# Altium PCB WallLight_V1.0.PcbDoc
Units mm, origin at the board's own origin, x right, y up, seen from the top; angles counter-clockwise.
Board outline 40 x 35 mm, 4 copper layers (Top Layer, Mid-Layer 1, Mid-Layer 2, Bottom Layer), stack 1.578 mm thick; 1 components, 123 nets, 18 pads, 0 vias.
Unrouted connection lines stored in the file: 8.
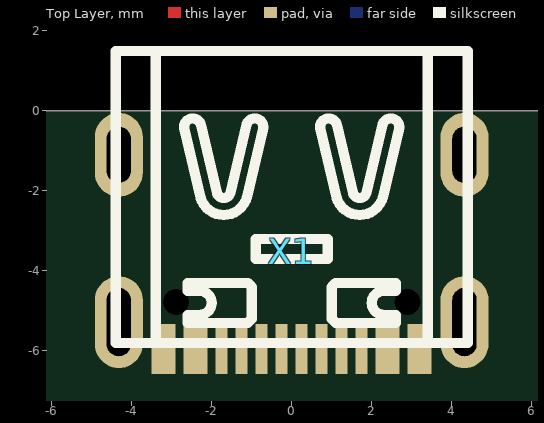
[diagram p0: Top Layer view]
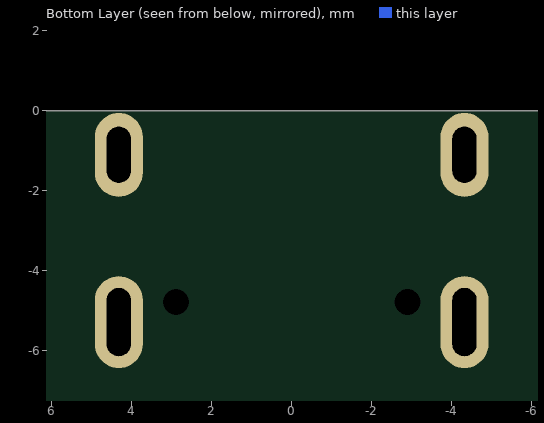
[diagram p1: Bottom Layer view, seen from below]

## Layer stack, top to bottom
Top Solder: solder mask 0.0102, Solder Resist, Dk 3.5
Top Layer: signal copper 0.0356
Dielectric1: dielectric 0.2, FR-4, Dk 4.8
Mid-Layer 1: signal copper 0.0356
Dielectric2: dielectric 1.036, FR-4, Dk 4.8
Mid-Layer 2: signal copper 0.0356
Dielectric3: dielectric 0.2, FR-4, Dk 4.8
Bottom Layer: signal copper 0.0356
Bottom Solder: solder mask 0.0102, Solder Resist, Dk 3.5

## Board outline
-20,-35 -20,0 20,0 20,-35

## Design rules (kind name [scope] priority, off if disabled: settings)
Clearance "Stitching GND" [IsStitchingVia and InNet('GND') vs (IsVia and (Not IsStitchingVia)) Or IsPad] p1: gap=0.127 ignorepadtopadclearanceinfootprint=FALSE
Clearance Clearance_Poly_GND_DiffPair [InPolygon and InNet('GND') vs InAnyDifferentialPair] p2: gap=0.838 ignorepadtopadclearanceinfootprint=FALSE
Clearance Clearance_Poly_GND_Top [InPolygon and InNet('GND') vs OnLayer('Top Layer')] p3: gap=0.305 ignorepadtopadclearanceinfootprint=FALSE
Clearance Clearance_Poly_GND_Bottom [InPolygon and InNet('GND') vs OnLayer('Bottom Layer')] p4: gap=0.305 ignorepadtopadclearanceinfootprint=FALSE
Clearance Clearance_Poly [InPolygon vs Not InNet('GND')] p5: gap=0.152 ignorepadtopadclearanceinfootprint=FALSE
Clearance Clearance_Via [isvia AND (AsMM(HoleDiameter) = 0.2) vs isvia AND (AsMM(HoleDiameter) = 0.2)] p6: gap=0.249 ignorepadtopadclearanceinfootprint=FALSE
Clearance [All] p7: gap=0.089 ignorepadtopadclearanceinfootprint=FALSE except(0.127: SMDPad-SMDPad)
ComponentClearance Component_Display [(Identifier = 'Spacer')] p1: gap=0 collisioncheckmode=3 verticalgap=0 showdistances=FALSE
ComponentClearance [All] p2: gap=0 collisioncheckmode=3 verticalgap=0.04 showdistances=TRUE
DiffPairsRouting [All] p1: maxlimit=2.54 minlimit=0.089 mostfreqgap=0.127 toplayer_minwidth=0.127 toplayer_maxwidth=0.381 toplayer_prefwidth=0.127 midlayer1_minwidth=0.127 midlayer1_maxwidth=0.381 midlayer1_prefwidth=0.127 midlayer2_minwidth=0.127 midlayer2_maxwidth=0.381 midlayer2_prefwidth=0.127 bottomlayer_minwidth=0.127 bottomlayer_maxwidth=0.381 bottomlayer_prefwidth=0.127 maxuncoupledlength=12.7
Height [All] p1: minheight=0 maxheight=150 prefheight=2
HoleSize [All] p1: absolutevalues=TRUE maxlimit=20.32 minlimit=0.2 maxpercent=80.000 minpercent=20.000
HoleToHoleClearance [InDrillLayerPair('Top Layer - Bottom Layer')] p1: gap=0.5 allowstackedmicrovias=FALSE
MinimumAnnularRing [All] p1: minimumring=0.089
MinimumSolderMaskSliver [All] p1: minsoldermaskwidth=0
PlaneConnect [All] p1: pad.planeconnectstyle=Relief pad.reliefexpansion=0.508 pad.reliefentries=4 pad.reliefconductorwidth=0.254 pad.reliefairgap=0.254 via.planeconnectstyle=Direct via.reliefexpansion=0.508 via.reliefentries=4 via.reliefconductorwidth=0.254 via.reliefairgap=0.254
PolygonConnect [All] p1: thpad.connectstyle=Relief thpad.reliefconductorwidth=0.254 thpad.reliefentries=4 thpad.polygonreliefangle="90 Angle" thpad.airgapwidth=0.254 smdpad.connectstyle=Relief smdpad.reliefconductorwidth=0.254 smdpad.reliefentries=4 smdpad.polygonreliefangle="90 Angle" smdpad.airgapwidth=0.254 via.connectstyle=Direct via.reliefconductorwidth=0.254 via.reliefentries=4 via.polygonreliefangle="90 Angle" via.airgapwidth=0.254
RoutingVias [All] p1: holewidth=0.3 width=0.62 viastyle="Through Hole" minholewidth=0.2 minwidth=0.44 maxholewidth=0.8 maxwidth=1.1
SilkToSilkClearance [All] p1: silktosilkclearance=0
SilkToSolderMaskClearance [IsPad] p1: minsilkscreentomaskgap=0 clearancetoexposedcopper=TRUE
SolderMaskExpansion [All] p1: expansion=0.102 istentingtop=FALSE
Width [Not InNet('No Net')] p1: maxlimit=4 minlimit=0.089 preferedwidth=0.254
Width Logos [All] p2: maxlimit=0.254 minlimit=0.003 preferedwidth=0.003
21 further rules are at their usual default settings.

## Classes and differential pairs
differential pair USB_D: +USB_D_P -USB_D_N

## Components (designator, comment, footprint, x,y, rotation, side; value= is the part's Value field where it differs from the comment)
X1 "USB 2.0 Typ-C" "SMD USB-C Socket (A40-00119)" 0,1.5 r180 top

## Footprints (in the part's own frame and the unit in brackets; to place one, negate y for a bottom-side part, rotate by r counter-clockwise, add the part's x,y. Pads: shape width x height; smd on the part's side, far side on the other; paste and mask are expansions set on the pad)
"SMD USB-C Socket (A40-00119)" [mm]
  rect 0.6x1.25 smd: A1B12(-3.2,7.45) A4B9(-2.4,7.45) B1A12(3.2,7.45) B4A9(2.4,7.45)
  rect 0.3x1.25 smd: A5(-1.25,7.45) A6(-0.25,7.45) A7(0.25,7.45) A8(1.25,7.45) B5(1.75,7.45) B6(0.75,7.45) B7(-0.75,7.45) B8(-1.75,7.45)
  oval 1.2x2.1 hole 0.6 slot 1.4 at 90 deg: G1(-4.32,2.6) G3(4.32,2.6)
  oval 1.2x2.3 hole 0.6 slot 1.7 at 90 deg: G2(-4.32,6.78) G4(4.32,6.78)
  round 0 hole 0.65 unplated: NC(-2.89,6.28) NC(2.89,6.28)
  silkscreen extent -4.4,0 4.4,7.3, body extent -4.47,0 4.48,7.75, height 3.26

## Part data
X1: library part X-USB-Buchse, "Typ-C", Component Value=USB4105-GF-A, JLC-Parts=C167321, aliExpress=33045191307, Component Description="USB Connector Type-C", ComponentLink1Description=Datasheet, ComponentLink1URL=https://datasheet.lcsc.com/lcsc/2103051833_Jing-Extension-of-the-Electronic-Co--918-418K2023S40001_C167321.pdf, Digikey=2073-USB4105-GF-ACT-ND, Farnell=3583366, Unit Price=0.34

## Nets (pads, with @x,y where several pads share a name; then routed paths per layer and width w, separated by ;. In a path a pad name is that pad's centre, name@x,y a point inside that pad or via, vN(x,y) a via of type N, cw(c..) or ccw(c..) an arc to the next point about the centre after c; other vN are vias at no path point)
3V3: 
BAT_MSR: 
BL: 
DSA_BL: 
DSA_C\S\: 
DSA_C\S\0: 
DSA_C\S\1: 
DSA_C\S\2: 
DSA_C\S\3: 
DSA_C\S\4: 
DSA_C\S\5: 
DSA_C\S\6: 
DSA_C\S\7: 
DSA_CS0: 
DSA_CS1: 
DSA_CS2: 
DSA_DC: 
DSA_MOSI: 
DSA_R\S\T\: 
DSA_SCLK: 
DSM_BL: 
DSM_C\S\: 
DSM_DC: 
DSM_MOSI: 
DSM_R\S\T\: 
DSM_SCLK: 
GND: X1.A1B12 X1.B1A12 X1.G1 X1.G2 X1.G3 X1.G4
HMI_CLK: 
HMI_DATA: 
HMI_ENA: 
HMI_ENB: 
HMI_ENS: 
HMI_L\D\: 
NetA1_1: 
NetC9_2: 
NetC11_1: 
NetC12_1: 
NetC13_1: 
NetC14_2: 
NetC16_2: 
NetC23_1: 
NetC24_2: 
NetC27_2: 
NetC30_2: 
NetC33_2: 
NetD3_K: 
NetD4_K: 
NetK1_G: 
NetK3_G: 
NetK6_D: 
NetK6_G: 
NetK9_D: 
NetL2_1: 
NetP1_K: 
NetP2_2: 
NetP3_2: 
NetP4_2: 
NetP5_2: 
NetP6_2: 
NetP7_2: 
NetP8_2: 
NetP9_2: 
NetP10_21: 
NetP10_22: 
NetP10_23: 
NetP10_24: 
NetR2_2: 
NetR3_1: X1.B5
NetR4_1: X1.A5
NetR9_2: 
NetR10_2: 
NetR35_1: 
NetR35_2: 
NetR35_3: 
NetR35_4: 
NetR36_1: 
NetR36_2: 
NetR36_3: 
NetR36_4: 
NetR37_1: 
NetR37_2: 
NetR37_3: 
NetR37_4: 
NetR38_1: 
NetR38_2: 
NetR38_3: 
NetR38_4: 
NetR39_1: 
NetR39_2: 
NetR39_3: 
NetR39_4: 
NetR40_1: 
NetR40_2: 
NetR40_3: 
NetR40_4: 
NetR41_1: 
NetR41_2: 
NetR41_3: 
NetR41_4: 
NetR42_1: 
NetR42_2: 
NetR42_3: 
NetR42_4: 
NetS2_1: 
NetTP3_1: 
NetTP4_1: 
NetTP11_1: 
NetTP12_1: 
NetTP19_1: 
NetU9_9: 
NetU10_9: 
NetU11_9: 
PWR_OFF: 
PWR_SW: 
TCH_I\N\T\: 
TCH_R\S\T\: 
TCH_SCL: 
TCH_SDA: 
USB_D_N: X1.A7 X1.B7
USB_D_P: X1.A6 X1.B6
VBAT: 
VBUS: X1.A4B9 X1.B4A9
VIN: 
pads on no net: X1.A8 X1.B8 X1.NC

## Silkscreen, mask and mechanical layers (free items; w line width, h text height)
Mechanical 1:
  lines w0.254: -20,-35 20,-35 20,0 0,0 -20,0 -20,-35
Mechanical 15:
  lines w0.127: -148.58,-54.99 -143.5,-54.99 ; -148.58,-6.73 -143.5,-6.73 ; -148.58,41.53 -143.5,41.53 ; -143.5,-90.55 -29.2,-90.55 ; -143.5,-82.93 -29.2,-82.93 ; -120.64,-98.17 -120.64,-82.93 ; -75.555,-103.25 -75.555,-98.17 ; -75.555,84.71 -75.555,89.79 ; -67.3,-98.17 -67.3,-82.93 -67.3,-67.69 ; -67.3,-75.31 -29.2,-75.31 ; -2.53,-103.25 -2.53,-98.17 ; -2.53,84.71 -2.53,89.79 ; 6.36,-98.17 -29.2,-98.17 ; 70.495,-103.25 70.495,-98.17 ; 70.495,84.71 70.495,89.79 ; 128.52,-55.25 133.6,-55.25 ; 128.52,-6.25 133.6,-6.25 ; 128.52,41.75 133.6,41.75 ; -143.5,-98.17 128.52,-98.25 128.52,84.75 -143.5,84.71 -143.5,-98.17 ; -143.5,-98.17 -29.2,-98.17 ; -143.5,-98.17 -143.5,-67.69 -67.3,-67.69 ; -67.3,-67.69 -29.2,-67.69 -29.2,-98.17 ; -148.58,-103.25 133.52,-103.25 133.52,89.75 -148.58,89.79 -148.58,-103.25
  text "4" at -111.42,86.361 h1.78
  text "3" at -38.522,86.361 h1.78
  text "2" at 34.63,86.361 h1.78
  text "1" at 107.274,86.361 h1.78
  text "A" at 132.52,63.75 h1.78
  text "A" at -145.405,63.349 h1.78
  text "B" at 131.52,15.75 h1.78
  text "B" at -145.405,15.292 h1.78
  text "C" at -145.405,-33.222 h1.78
  text "C" at 131.52,-33.25 h1.78
  text "TITLE:" at -68.57,-70.23 h1.14
  text "ENGINEER:" at -30.47,-70.23 h1.14
  text "Florian Baumgartner" at -31.966,-74.073 h1.78
  text "PCB DESIGNER:" at -30.47,-77.723 h1.14
  text "WallLight Remote" at -69.191,-78.315 h4
  text "D" at -145.405,-81.228 h1.78
  text "D" at 131.52,-81.25 h1.78
  text "Florian Baumgartner" at -31.966,-81.693 h1.78
  text "REV:" at -121.91,-85.47 h1.14
  text "PART NO.:" at -68.57,-85.47 h1.14
  text "DATE:" at -30.47,-85.47 h1.14
  text "11.06.2023" at -31.74,-88.518 h1.78
  text "V1.1" at -122.771,-89.313 h1.78
  text "1/1" at -68.796,-89.313 h1.78
  text "SCALE:" at -121.91,-93.09 h1.14
  text "DWG NO:" at -68.57,-93.09 h1.14
  text "FILE NAME:" at -30.47,-93.09 h1.14
  text "WallLightRemote_V1.0.PcbDoc" at -31.966,-96.298 h1.45
  text "1:1" at -122.771,-96.933 h1.78
  text "1/1" at -68.796,-96.933 h1.78
  text "4" at -111.42,-101.599 h1.78
  text "3" at -38.522,-101.599 h1.78
  text "2" at 34.63,-101.599 h1.78
  text "1" at 107.274,-101.599 h1.78
Mechanical 16:
  lines w0.127: -148.58,-55.25 -143.5,-55.25 ; -148.58,-6.25 -143.5,-6.25 ; -148.58,41.75 -143.5,41.75 ; -85.475,-103.25 -85.475,-98.17 ; -85.475,84.71 -85.475,89.79 ; -21.34,-98.17 14.22,-98.17 ; -12.45,-103.25 -12.45,-98.17 ; -12.45,84.71 -12.45,89.79 ; 14.22,-90.55 128.52,-90.55 ; 14.22,-82.93 128.52,-82.93 ; 14.22,-75.31 52.32,-75.31 ; 52.32,-98.17 52.32,-82.93 52.32,-67.69 ; 60.575,-103.25 60.575,-98.17 ; 60.575,84.71 60.575,89.79 ; 105.66,-98.17 105.66,-82.93 ; 128.52,-54.99 133.6,-54.99 ; 128.52,-6.73 133.6,-6.73 ; 128.52,41.53 133.6,41.53 ; 14.22,-98.17 14.22,-67.69 52.32,-67.69 ; 14.22,-98.17 128.52,-98.17 ; 52.32,-67.69 128.52,-67.69 128.52,-98.17 ; 128.52,-98.17 128.52,84.71 -143.5,84.75 -143.5,-98.25 128.52,-98.17 ; -148.5,-103.25 -148.5,89.75 133.6,89.79 133.6,-103.25 -148.5,-103.25
  text "1" at -122.254,86.361 h1.78
  text "2" at -49.61,86.361 h1.78
  text "3" at 23.542,86.361 h1.78
  text "4" at 96.44,86.361 h1.78
  text "A" at -147.5,63.75 h1.78
  text "A" at 130.425,63.349 h1.78
  text "B" at -146.5,15.75 h1.78
  text "B" at 130.425,15.292 h1.78
  text "C" at 130.425,-33.222 h1.78
  text "C" at -146.5,-33.25 h1.78
  text "ENGINEER:" at 15.49,-70.23 h1.14
  text "TITLE:" at 53.59,-70.23 h1.14
  text "Florian Baumgartner" at 16.534,-74.073 h1.78
  text "PCB DESIGNER:" at 15.49,-77.723 h1.14
  text "WallLight Remote" at 53.999,-78.315 h4
  text "D" at 130.425,-81.228 h1.78
  text "D" at -146.5,-81.25 h1.78
  text "Florian Baumgartner" at 16.534,-81.693 h1.78
  text "DATE:" at 15.49,-85.47 h1.14
  text "PART NO.:" at 53.59,-85.47 h1.14
  text "REV:" at 106.93,-85.47 h1.14
  text "11.06.2023" at 16.76,-88.518 h1.78
  text "1/1" at 53.364,-89.313 h1.78
  text "V1.1" at 106.704,-89.313 h1.78
  text "FILE NAME:" at 15.49,-93.09 h1.14
  text "DWG NO:" at 53.59,-93.09 h1.14
  text "SCALE:" at 106.93,-93.09 h1.14
  text "WallLightRemote_V1.0.PcbDoc" at 16.534,-96.298 h1.45
  text "1/1" at 53.364,-96.933 h1.78
  text "1:1" at 106.704,-96.933 h1.78
  text "1" at -122.254,-101.599 h1.78
  text "2" at -49.61,-101.599 h1.78
  text "3" at 23.542,-101.599 h1.78
  text "4" at 96.44,-101.599 h1.78